# Altium PCB UZ_A_Template.PcbDoc
Units mm, origin at the board's own origin, x right, y up, seen from the top; angles counter-clockwise.
Board outline 156 x 100 mm, 4 copper layers (Top Layer, GND, VCC, Bottom Layer), stack 0.778 mm thick; 49 components, 68 nets, 188 pads, 0 vias.
Unrouted connection lines stored in the file: 110.
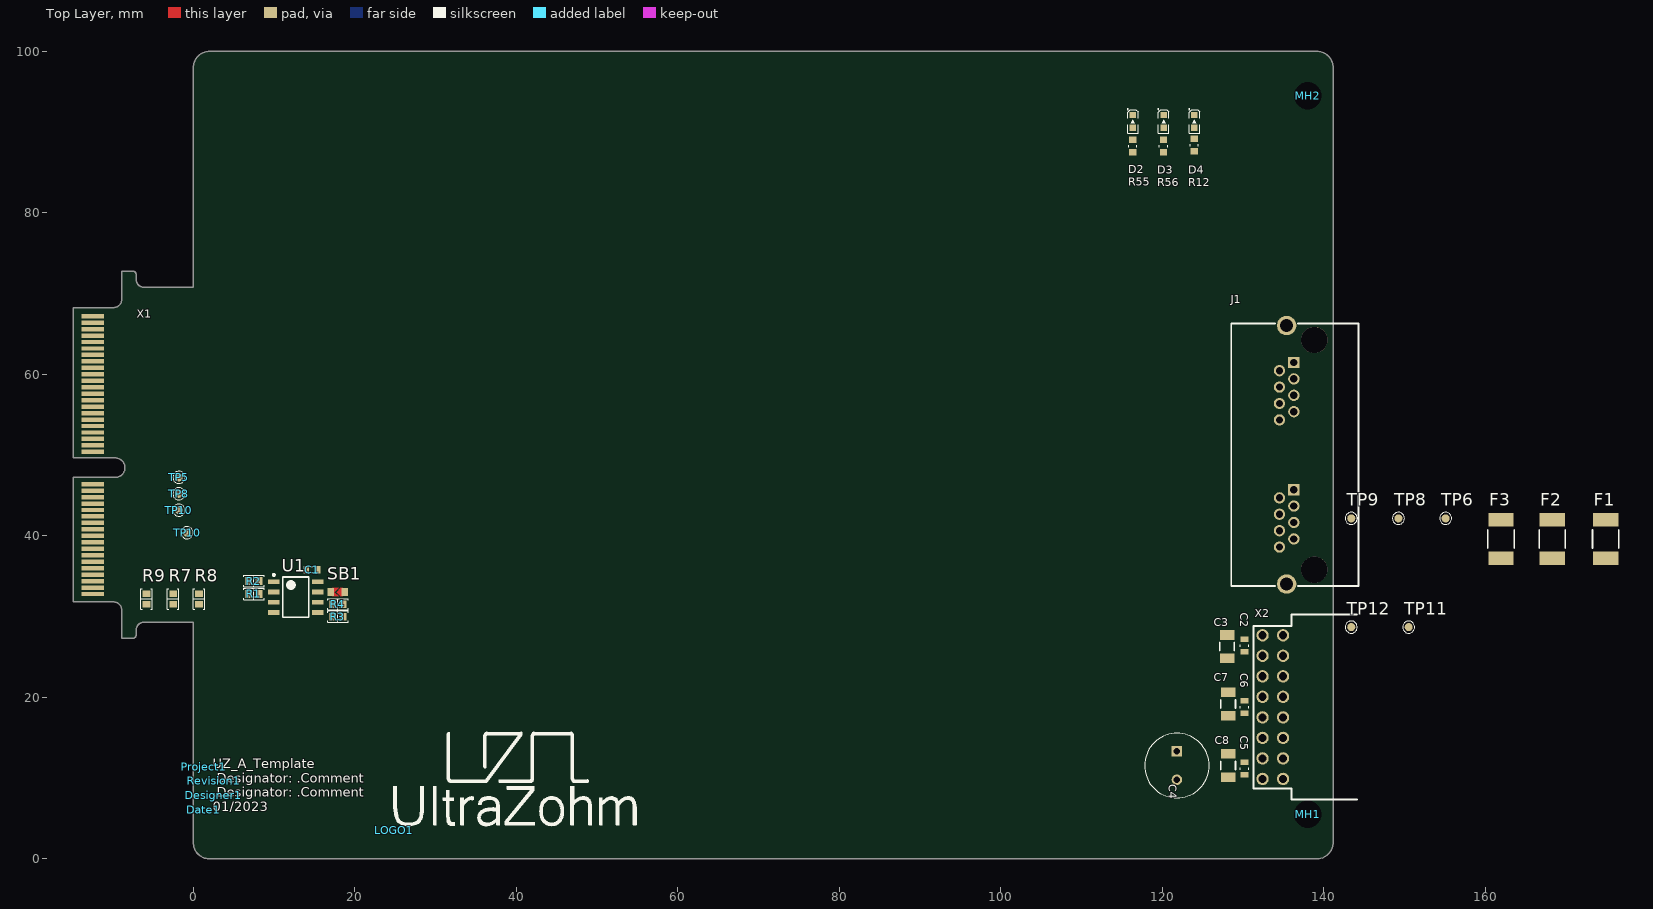
[diagram p0: Top Layer view]
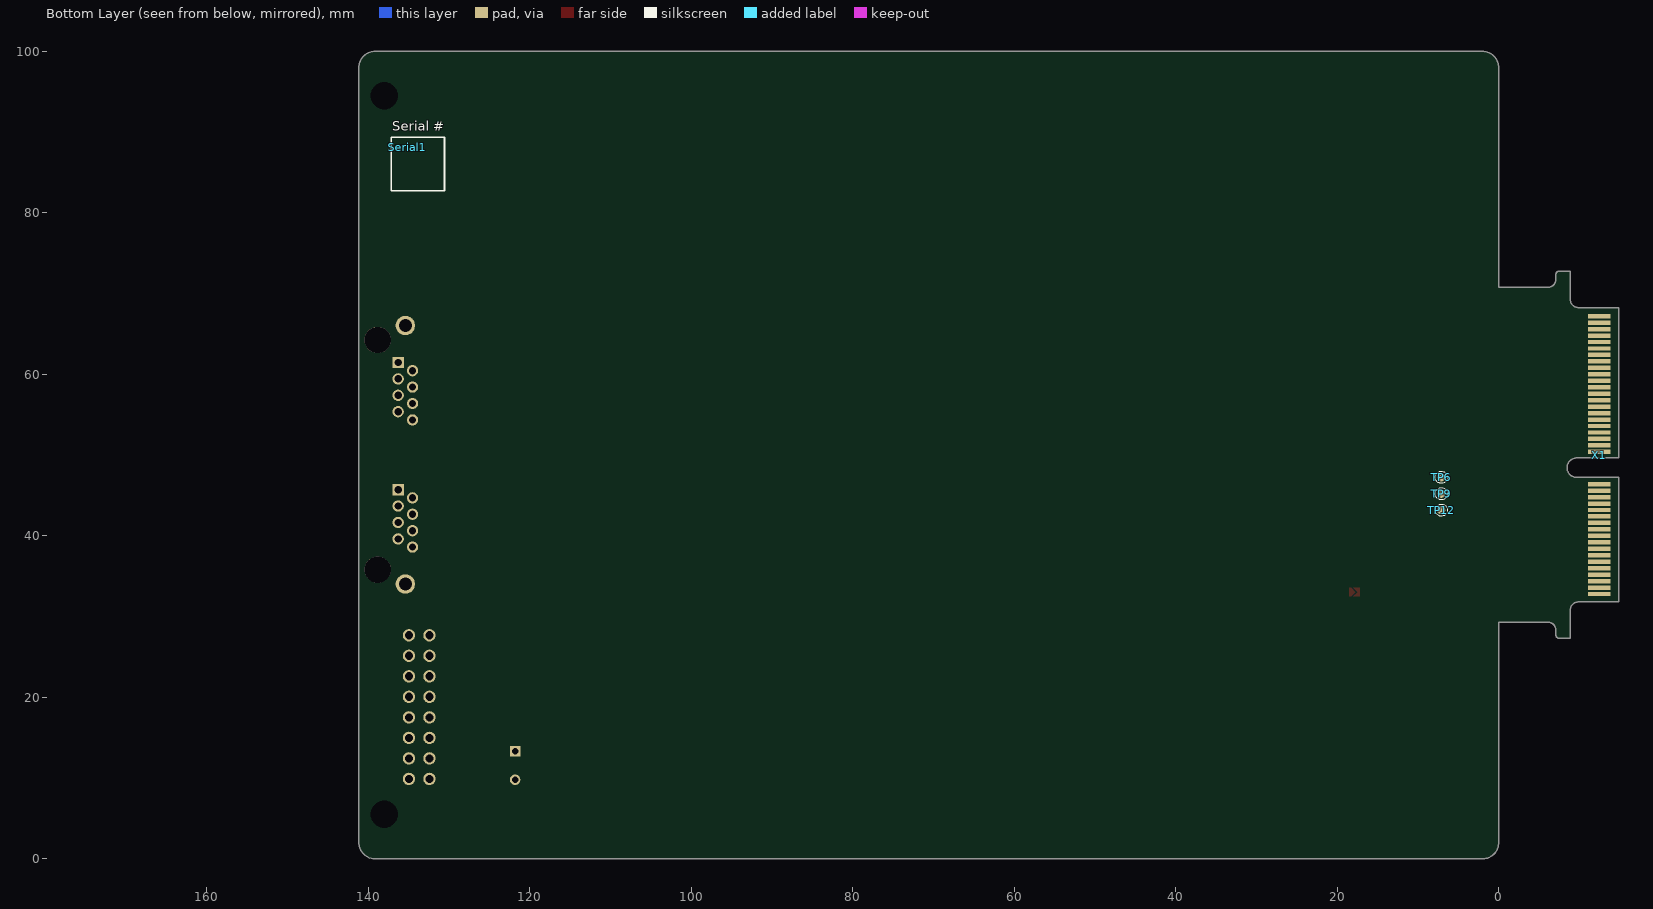
[diagram p1: Bottom Layer view, seen from below]

## Layer stack, top to bottom
Top Solder: solder mask 0.0102, Solder Resist, Dk 3.5
Top Layer: signal copper 0.0356
Dielectric 1: core 0.254, FR-4, Dk 4.2
GND: signal copper 0.036
Dielectric 3: prepreg 0.127, Dk 4.2
VCC: signal copper 0.036
Dielectric 2: core 0.254, Dk 4.2
Bottom Layer: signal copper 0.0356
Bottom Solder: solder mask 0.0102, Solder Resist, Dk 3.5

## Board outline
-14.859,31.821 -9.859,31.821 cw(c-9.859,30.821) -8.859,30.821 -8.859,27.321 -7.479,27.321 ccw(c-7.479,27.721) -7.079,27.721 -7.079,28.321 cw(c-6.079,28.321) -6.079,29.321 0,29.321 0,2.007 ccw(c2.032,2.032) 2.057,0 139.1,0 ccw(c139.1,2.04) 141.14,2.04 141.14,97.96 ccw(c139.1,97.96) 139.1,100 2.032,100 ccw(c2.032,97.968) 0,97.968 0,70.771 -6.079,70.771 cw(c-6.079,71.771) -7.079,71.771 -7.079,72.371 ccw(c-7.479,72.371) -7.479,72.771 -8.859,72.771 -8.859,69.271 cw(c-9.859,69.271) -9.859,68.271 -14.859,68.271 -14.859,49.646 -9.659,49.646 cw(c-9.659,48.446) -9.659,47.246 -14.859,47.246

## Design rules (kind name [scope] priority, off if disabled: settings)
BoardOutlineClearance BoardOutlineClearance_TopOverlay [OnLayer('Top Overlay') or OnLayer('Bottom Overlay')] p1: gap=0 ignorepadtopadclearanceinfootprint=FALSE
BoardOutlineClearance [All] p2: gap=0.508 ignorepadtopadclearanceinfootprint=FALSE except(0: Arc-SplitContinuation Track-SplitContinuation SMDPad-SplitContinuation THPad-SplitContinuation Via-SplitContinuation Fill-SplitContinuation Poly-SplitContinuation Region-SplitContinuation Text-OutlineEdge Text-CavityEdge Text-CutoutEdge Text-SplitBarrior Text-SplitContinuation; 0.254: SMDPad-OutlineEdge SMDPad-CavityEdge SMDPad-CutoutEdge SMDPad-SplitBarrior)
Clearance [All] p1: gap=0.09 ignorepadtopadclearanceinfootprint=FALSE except(0: Arc-Text Arc-Hole Track-Text Track-Hole SMDPad-Text SMDPad-Hole THPad-Text THPad-Hole Via-Text Via-Hole Fill-Text Fill-Hole Poly-Text Poly-Hole Region-Text Region-Hole Text-Text Text-Hole; 0.127: Arc-Via Track-Via SMDPad-Via THPad-Via Via-Via; 0.9: Arc-Arc Arc-Track Arc-SMDPad Arc-THPad Track-Track Track-SMDPad Track-THPad SMDPad-SMDPad SMDPad-THPad THPad-THPad)
DiffPairsRouting [All] p1: maxlimit=0.254 minlimit=0.089 mostfreqgap=0.178 toplayer_minwidth=0.089 toplayer_maxwidth=0.381 toplayer_prefwidth=0.254 midlayer1_minwidth=0.089 midlayer1_maxwidth=0.381 midlayer1_prefwidth=0.254 midlayer2_minwidth=0.089 midlayer2_maxwidth=0.381 midlayer2_prefwidth=0.254 bottomlayer_minwidth=0.089 bottomlayer_maxwidth=0.381 bottomlayer_prefwidth=0.254 maxuncoupledlength=12.7
HoleSize [All] p1: absolutevalues=TRUE maxlimit=6.3 minlimit=0.2 maxpercent=80.000 minpercent=20.000
MatchedLengths [All] p1: tolerance=0.254 checknetsindiffpair=TRUE checkdiffpairvsdiffpair=FALSE checkxsignals=FALSE checkothers=FALSE
MinimumSolderMaskSliver [All] p1: minsoldermaskwidth=0.089
PlaneConnect [All] p1: pad.planeconnectstyle=Relief pad.reliefexpansion=0.508 pad.reliefentries=4 pad.reliefconductorwidth=0.254 pad.reliefairgap=0.254 via.planeconnectstyle=Direct via.reliefexpansion=0.508 via.reliefentries=4 via.reliefconductorwidth=0.254 via.reliefairgap=0.254
PolygonConnect PolygonConnect_GND [InNet('GND')] p1: thpad.connectstyle=Relief thpad.reliefconductorwidth=0.254 thpad.reliefentries=4 thpad.polygonreliefangle="90 Angle" thpad.airgapwidth=0.254 smdpad.connectstyle=Relief smdpad.reliefconductorwidth=0.254 smdpad.reliefentries=4 smdpad.polygonreliefangle="90 Angle" smdpad.airgapwidth=0.254 via.connectstyle=Direct via.reliefconductorwidth=0.254 via.reliefentries=4 via.polygonreliefangle="90 Angle" via.airgapwidth=0.254
PolygonConnect [All] p2: connectstyle=Direct reliefconductorwidth=0.254 reliefentries=4 polygonreliefangle="90 Angle" airgapwidth=0.127
RoomDefinition Component_UpperEdgeKeepOut [All] p1: confinementstyle=ConfineOut formatcopy=TRUE lockcomponents=FALSE outline 0,97 142,97 142,100 0,100
RoomDefinition Component_LowerEdgeKeepOut [All] p2: confinementstyle=ConfineOut formatcopy=TRUE lockcomponents=FALSE outline 0,0 142,0 142,3 0,3
RoutingVias [All] p1: holewidth=0.3 width=0.6 viastyle="Through Hole" minholewidth=0.2 minwidth=0.45 maxholewidth=0.8 maxwidth=1.6
SilkToSilkClearance [All] p1: silktosilkclearance=0
SilkToSolderMaskClearance [IsPad] p1: minsilkscreentomaskgap=0 clearancetoexposedcopper=TRUE
SolderMaskExpansion [All] p1: expansion=0.102 istentingtop=FALSE
Width [All] p1: maxlimit=0.762 minlimit=0.089 preferedwidth=0.254
24 further rules are at their usual default settings.

## Classes and differential pairs
component class TopSheet: Date1 Designer1 LOGO1 Project1 ProjectName1 Revision1 Serial1 Serial2
net class AIN_B_P[1..4]: AIN_B_P1 AIN_B_P2 AIN_B_P3 AIN_B_P4
net class AIN_B_N[1..4]: AIN_B_N1 AIN_B_N2 AIN_B_N3 AIN_B_N4
net class AIN_A_P[1..4]: AIN_A_P1 AIN_A_P2 AIN_A_P3 AIN_A_P4
net class AIN_A_N[1..4]: AIN_A_N1 AIN_A_N2 AIN_A_N3 AIN_A_N4
component class U_CarrierConnector: C1 F1 F2 F3 R1 R2 R3 R4 R7 R8 R9 SB1 TP5 TP6 TP8 TP9 TP10 TP11 TP12 U1 X1
component class U_AnalogConnector: C2 C3 C4 C5 C6 C7 C8 D2 D3 D4 J1 MH1 MH2 R12 R55 R56 X2

## Components (designator, comment, footprint, x,y, rotation, side; value= is the part's Value field where it differs from the comment)
C1 "100 nF" C_0603 14.7,35.8 r180 top
C2 "100nF" CAPC1608X07N 130.175,26.416 r90 top
C3 "10µF" C_1206 128.016,26.289 r270 top
C4 "220 uF" WCAP-ATG5_8X11.5X3.5 121.793,11.557 r90 top
C5 "100nF" CAPC1608X07N 130.175,11.176 r90 top
C6 "100nF" CAPC1608X07N 130.175,18.796 r90 top
C7 "10µF" C_1206 128.143,19.177 r270 top
C8 "10µF" C_1206 128.143,11.557 r270 top
D2 "150060BS75000" WL-SMCW_0603 116.332,91.313 r270 top (schematic designator D1)
D3 "150060GS75000" WL-SMCW_0603 120.142,91.313 r270 top (schematic designator D2)
D4 "150060RS75000" WL-SMCW_0603 123.952,91.313 r270 top (schematic designator D3)
Date1 "01/2023" COMMENT 1.27,6.096 r0 top
Designer1 "A. Musterfrau" Designator:comment 2.54,7.874 r0 top
F1 "Littelfuse_PTC_1812" 1812_PTC_Polyfuse_Littelfuse 174.879,39.624 r90 top value="PTC, 1.1 A, 24V"
F2 "Littelfuse_PTC_1812" 1812_PTC_Polyfuse_Littelfuse 168.275,39.624 r90 top value="PTC, 1.1 A, 24V"
F3 "Littelfuse_PTC_1812" 1812_PTC_Polyfuse_Littelfuse 161.925,39.624 r90 top value="PTC, 1.1 A, 24V"
J1 "RJHSE-5380-02" RJHSE-5380-02 138.811,35.814 r90 top locked
LOGO1 "UZ Logo" UZ_Logo_small 24.892,3.556 r0 top
MH1 "mounting hole 3,4mm" MH_3.4#1 137.16,3.988 r0 top
MH2 "mounting hole 3,4mm" MH_3.4#2 137.16,94.437 r0 top
Project1 "UZ_A_Template" COMMENT 1.27,11.43 r0 top
R1 "4k7" "RES 0603_1608" 7.5,32.8 r180 top
R2 "4k7" "RES 0603_1608" 7.5,34.4 r180 top
R3 "100k" "RES 0603_1608" 17.893,30 r0 top
R4 "100k" "RES 0603_1608" 17.893,31.539 r0 top
R7 "0R" "RES 0603_1608" -2.5,32.189 r90 top
R8 "0R" "RES 0603_1608" 0.7,32.189 r90 top
R9 "0R" "RES 0603_1608" -5.8,32.189 r90 top
R12 "1k" RESC1608X06N 123.952,88.392 r270 top
R55 "20k" RESC1608X06N 116.332,88.265 r270 top (schematic designator R10)
R56 "4.7k" RESC1608X06N 120.142,88.265 r270 top (schematic designator R11)
Revision1 "Rev01" Designator:comment 2.54,9.652 r0 top
SB1 "Solder Bump 0603" SB_0603 17.893,33.047 r0 top
Serial1 "Serial #" SERIAL 135.128,88.138 r180 bottom
TP5 "PIN47" TP_1MM -1.778,47.244 r0 top value="Testpoint 1mm" (schematic designator TP1)
TP6 "PIN53" TP_1mm 155.067,42.164 r90 top value="Testpoint 1mm"
TP6 "PIN48" TP_1MM 7.112,47.244 r180 bottom value="Testpoint 1mm" (schematic designator TP2)
TP8 "PIN53" TP_1mm 149.225,42.164 r90 top value="Testpoint 1mm"
TP8 "PIN49" TP_1MM -1.778,45.212 r0 top value="Testpoint 1mm" (schematic designator TP3)
TP9 "PIN53" TP_1mm 143.383,42.164 r90 top value="Testpoint 1mm"
TP9 "PIN50" TP_1MM 7.112,45.212 r180 bottom value="Testpoint 1mm" (schematic designator TP4)
TP10 "PIN53" TP_1MM -0.762,40.386 r0 top value="Testpoint 1mm"
TP10 "PIN53" TP_1MM -1.778,43.18 r0 top value="Testpoint 1mm" (schematic designator TP5)
TP11 "PIN53" TP_1mm 150.495,28.702 r90 top value="Testpoint 1mm"
TP12 "PIN53" TP_1mm 143.383,28.702 r90 top value="Testpoint 1mm"
TP12 "PIN56" TP_1MM 7.112,43.18 r180 bottom value="Testpoint 1mm" (schematic designator TP7)
U1 "M24C02-WMN6TP" D0008A_N 12.691,32.412 r0 top
X1 "HSEC8-140-01-XX-DV-A-BL-CARD" HSEC8-140-01-XX-DV-A-BL-CARD -14.846,50 r270 bottom
X2 "IPL1-108-01-L-D-RA-K" IPL1-108-01-L-D-RA-K 133.669,18.796 r270 top

## Footprints (in the part's own frame and the unit in brackets; to place one, negate y for a bottom-side part, rotate by r counter-clockwise, add the part's x,y. Pads: shape width x height; smd on the part's side, far side on the other; paste and mask are expansions set on the pad)
1812_PTC_Polyfuse_Littelfuse [mm] "Chip Fuse, 2-Leads, Body 4.6x3.24mm"
  rect 1.68x3.14 smd: 1(-2.39,0) 2(2.39,0)
  silkscreen extent -1.15,-1.62 1.15,1.62, body extent -2.3,-1.62 2.3,1.62, height 1.15
C_0603 [mm] "Chip Capacitor, Body 1.6x0.8mm, Height 1.0mm, IPC High Density"
  rect 0.7x0.9 smd: 1(-0.7,0) 2(0.7,0)
  silkscreen extent -0.05,-0.35 0.05,0.35, body extent -0.87,-0.47 0.88,0.48, height 1
C_1206 [mm]
  rect 1.21x1.82 smd: 1(1.45,0) 2(-1.45,0)
  silkscreen extent -0.5,-0.9 0.5,0.9, body extent -1.6,-0.81 1.6,0.81, height 1.82
CAPC1608X07N [mm] "Chip Capacitor, 2-Leads, Body 1,60x0,80mm, IPC Medium Density"
  rect 0.7x1 smd: 1(-0.775,0) 2(0.775,0)
  silkscreen extent -0.13,-0.51 0.13,0.51, body extent -0.88,-0.48 0.88,0.47, height 0.7
COMMENT [mm] "prints out the comment of a component"
D0008A_N [mm] "SOIC, 8-Leads, Body 5x4mm, Pitch 1.27mm, IPC Medium Density"
  rrect17% 1.45x0.6 smd: 1(-2.725,1.905) 2(-2.725,0.635) 3(-2.725,-0.635) 4(-2.725,-1.905) 5(2.725,-1.905) 6(2.725,-0.635) 7(2.725,0.635) 8(2.725,1.905)
  silkscreen extent -2.85,-2.5 1.6,2.88, body extent -3,-2.45 3,2.45, height 1.63
Designator:comment [mm] "prints out designator and comment of a component"
HSEC8-140-01-XX-DV-A-BL-CARD [mm]
  rect 0.55x2.8 smd far side mask+0.05: 1(-17.2,-2.4) 3(-16.4,-2.4) 5(-15.6,-2.4) 7(-14.8,-2.4) 9(-14,-2.4) 11(-13.2,-2.4) 13(-12.4,-2.4) 15(-11.6,-2.4) 17(-10.8,-2.4) 19(-10,-2.4) 21(-9.2,-2.4) 23(-8.4,-2.4) 25(-7.6,-2.4) 27(-6.8,-2.4) 29(-6,-2.4) 31(-5.2,-2.4) 33(-4.4,-2.4) 35(-3.6,-2.4) 37(-2.8,-2.4) 39(-2,-2.4) 41(-1.2,-2.4) 43(-0.4,-2.4) 45(3.6,-2.4) 47(4.4,-2.4) 49(5.2,-2.4) 51(6,-2.4) 53(6.8,-2.4) 55(7.6,-2.4) 57(8.4,-2.4) 59(9.2,-2.4) 61(10,-2.4) 63(10.8,-2.4) 65(11.6,-2.4) 67(12.4,-2.4) 69(13.2,-2.4) 71(14,-2.4) 73(14.8,-2.4) 75(15.6,-2.4) 77(16.4,-2.4) 79(17.2,-2.4)
  rect 0.55x2.8 smd mask+0.05: 2(-17.2,-2.4) 4(-16.4,-2.4) 6(-15.6,-2.4) 8(-14.8,-2.4) 10(-14,-2.4) 12(-13.2,-2.4) 14(-12.4,-2.4) 16(-11.6,-2.4) 18(-10.8,-2.4) 20(-10,-2.4) 22(-9.2,-2.4) 24(-8.4,-2.4) 26(-7.6,-2.4) 28(-6.8,-2.4) 30(-6,-2.4) 32(-5.2,-2.4) 34(-4.4,-2.4) 36(-3.6,-2.4) 38(-2.8,-2.4) 40(-2,-2.4) 42(-1.2,-2.4) 44(-0.4,-2.4) 46(3.6,-2.4) 48(4.4,-2.4) 50(5.2,-2.4) 52(6,-2.4) 54(6.8,-2.4) 56(7.6,-2.4) 58(8.4,-2.4) 60(9.2,-2.4) 62(10,-2.4) 64(10.8,-2.4) 66(11.6,-2.4) 68(12.4,-2.4) 70(13.2,-2.4) 72(14,-2.4) 74(14.8,-2.4) 76(15.6,-2.4) 78(16.4,-2.4) 80(17.2,-2.4)
IPL1-108-01-L-D-RA-K [mil]
  round 60 hole 40 mask+3: 1(-350,50) 2(-250,50) 3(-150,50) 4(-50,50) 5(50,50) 6(150,50) 7(250,50) 8(350,50) 9(-350,-50) 10(-250,-50) 11(-150,-50) 12(-50,-50) 13(50,-50) 14(150,-50) 15(250,-50) 16(350,-50)
  silkscreen extent -451,-94 451,410, body extent -430,-58 430,434, height 310
MH_3.4#1 [mm]
  round 3.1 hole 3.4 unplated: 1(0.84,1.512)
MH_3.4#2 [mm]
  round 3.1 hole 3.4 unplated: 1(0.84,0.063)
"RES 0603_1608" [mm] "Chip Resistor, 2-Leads, Body 1.60x0.80mm, IPC Medium Density"
  rect 0.85x0.95 smd: 1(-0.65,0) 2(0.65,0)
  silkscreen extent -1.27,-0.7 1.27,0.7, body extent -0.8,-0.4 0.8,0.4, height 0.45
RESC1608X06N [mm] "Chip Resistor, 2-Leads, Body 1,60x0,80mm, IPC Medium Density"
  rect 0.85x0.9 smd: 1(-0.775,0) 2(0.775,0)
  silkscreen extent -0.13,-0.51 0.13,0.51, body extent -0.8,-0.4 0.8,0.4, height 0.44
RJHSE-5380-02 [mm] "Modular Jack Horizontal Shielded Dual Port 8P8C Tab Up"
  rect 1.4x1.4 hole 0.9: A1(9.906,2.54) B1(25.654,2.54)
  round 1.4 hole 0.9: A2(8.89,4.318) A3(7.874,2.54) A4(6.858,4.318) A5(5.842,2.54) A6(4.826,4.318) A7(3.81,2.54) A8(2.794,4.318) B2(24.638,4.318) B3(23.622,2.54) B4(22.606,4.318) B5(21.59,2.54) B6(20.574,4.318) B7(19.558,2.54) B8(18.542,4.318)
  round 3.25 hole 3.25 unplated: MH1(0,0) MH2(28.448,0)
  round 2.4 hole 1.6: S1(-1.778,3.429) S2(30.226,3.429)
  silkscreen extent -2.03,-5.46 30.48,10.29, body extent -3.5,-5.41 31.95,10.29, height 15.06
SB_0603 [mil] "Solder Bump"
  rect 32x40 smd: 1(33.75,0) 2(-33.75,0)
  Top Layer region: 23.75,20 13.75,20 -6.25,0 13.75,-20 23.75,-20
  Top Layer region: -26.25,0 -16.25,0 3.75,20 -26.25,20
  Top Layer region: -26.25,0 -16.25,0 3.75,-20 -26.25,-20
SERIAL [mm]
  silkscreen extent -2,-5.4 4.6,1.2
TP_1MM [mm]
  round 1 smd paste-1: 1(0,0)
  silkscreen extent -0.75,-0.75 0.75,0.75
TP_1mm [mm]
  round 1 smd paste-1: 1(0,0)
  silkscreen extent -0.75,-0.75 0.75,0.75
UZ_Logo_small [mm] "logo width 3cm"
  silkscreen extent -0.05,0.57 29.94,12.12
WCAP-ATG5_8X11.5X3.5 [mm] "Aluminum Electrolytic Capacitors, 8x11.5mm"
  rect 1.3x1.3 hole 0.8: 1(1.75,0)
  round 1.3 hole 0.8: 2(-1.75,0)
  silkscreen extent -4,-4 4,4, body extent -3.99,-4 4,4, height 11.81
WL-SMCW_0603 [mm] "SMD Mono-color Chip LED, body 1.6x0.8mm"
  rect 0.8x0.8 smd: 1(-0.8,0) 2(0.8,0)
  silkscreen extent -1.59,-0.7 1.45,0.65, body extent -0.8,-0.4 0.8,0.4, height 0.7

## Part data
C1: library part C0603C104K9PACTU, "Capacitor 0603, 6.3 VDC, 100 nF, X5R", Device Package=0603, Manufacturer=KEMET, Operating Temperature="-55 - 85°C", Supplier Part Number 1=80-C0603C104K9P, Tolerance="10 %", Voltage Rating="6.3 VDC", Component Type="Capacitor 0603", ComponentLink1Description=Datasheet, ComponentLink1URL=https://www.mouser.de/datasheet/2/212/KEM_C1006_X5R_SMD-1103249.pdf, Created from=MGremer, Created On="20.12.2020 13:54:13", Last Updated="20.01.2021 13:57:36", Live Cycle Status=1, Manufacturer Part Number=C0603C104K9PACTU, Mounting Type=SMD, PartID=70, Series="SMD Comm X5R", Stock number="not stored", Supplier 1=Mouser, Type=Capacitor
C2 C5 C6: library part Cap_0603, Dielectric=X7R, MPN=885012206071, Package=0603, Supplier Part Number 1=710-885012206071, Voltage=25V, MF=Würth, Supplier 1=Mouser
C3 C7 C8: library part C_1206, "Capacitor 1206", Dielectric=X5R, MPN=GRM319R6YA106KA12D, Package=1206, Supplier Part Number 1=81-GRM319R6YA106KA2D, Tolerance=10%, Voltage=35V, Created=2018_06_25_AGeiger, MF="Murata Electronics", Supplier 1=Mouser
C4: library part 860020574012, "WCAP-ATG5 Aluminum Electrolytic Capacitors, 8x11.5mm, 35 Vdc, 220 uF", Operating Temperature="-40 °C up to +105 °C", Supplier Part Number 1=710-860020574012, Voltage=35V, ComponentLink1Description=Manufacturer, ComponentLink1URL=http://www.we-online.de, ComponentLink2Description=Datasheet, ComponentLink2URL=http://katalog.we-online.com/pbs/datasheet/860020574012.pdf, Life Cycle=2000h, MF="Wurth Elektronik", MPN=860020574012, Part Number=860020574012, Published Date="Sep. 2017", Size=8x11.5mm, Supplier 1=Mouser
D2: library part LED_Blue_0603, "WL-SMCW SMD Mono-color Chip LED Waterclear, size 0603, Blue, 3.2 V, 140°", Emitting Color=Blue, Forward Voltage="3.2 V", Package=0603, Supplier Part Number 1=2322069, ComponentLink1Description=Manufacturer, ComponentLink1URL=http://www.we-online.de, ComponentLink2Description=Datasheet, ComponentLink2URL=http://katalog.we-online.com/led/datasheet/150060BS75000.pdf, Created=2018_09_06_AGeiger, Dominant Wavelength="470 nm", Luminous Intensity="145 mcd", MF="Wuerth Elektronik", MPN=150060BS75000, Peak Wavelength="465 nm", Published Date="Sep. 2017", Size=0603, Supplier 1=Farnell, Supplier 2=Mouser, Supplier 3=Digi-Key, Supplier Part Number 2=710-150060BS75000, Supplier Part Number 3=732-4966-1-ND, Viewing Angle=140°
D3: library part LED_Green_0603, "WL-SMCW SMD Mono-color Chip LED Waterclear, size 0603, Green, 3.2 V, 140°", Emitting Color=Green, Forward Voltage="3.2 V", Package=0603, Supplier Part Number 1=2322070, ComponentLink1Description=Manufacturer, ComponentLink1URL=http://www.we-online.de, ComponentLink2Description=Datasheet, ComponentLink2URL=http://katalog.we-online.com/led/datasheet/150060GS75000.pdf, Created=2018_09_06_AGeiger, Dominant Wavelength="520 nm", Luminous Intensity="430 mcd", MF="Wuerth Elektronik", MPN=150060GS75000, Peak Wavelength="515 nm", Published Date="Sep. 2017", Size=0603, Supplier 1=Farnell, Supplier 2=Mouser, Supplier 3=Digi-Key, Supplier Part Number 2=710-150060GS75000, Supplier Part Number 3=732-4971-1-ND, Viewing Angle=140°
D4: library part LED_Red_0603, "WL-SMCW SMD Mono-color Chip LED Waterclear, size 0603, Red, 2 V, 140°", Emitting Color=Red, Forward Voltage="2 V", Package=0603, Supplier Part Number 1=2322071, ComponentLink1Description=Manufacturer, ComponentLink1URL=http://www.we-online.de, ComponentLink2Description=Datasheet, ComponentLink2URL=http://katalog.we-online.com/led/datasheet/150060RS75000.pdf, Created=2018_09_06_AGeiger, Dominant Wavelength="625 nm", Luminous Intensity="250 mcd", MF="Wuerth Elektronik", MPN=150060RS75000, Peak Wavelength="630 nm", Published Date="Sep. 2017", Size=0603, Supplier 1=Farnell, Supplier 2=Mouser, Supplier 3=Digi-Key, Supplier Part Number 2=710-150060RS75000, Supplier Part Number 3=732-4978-1-ND, Viewing Angle=140°
Date1: library part 5, "Create a project parameter named \"FinDate\" this is the value of this component. It is printed on the PCB. Once the parameter is updated (e.g. new revision) it gets updated on the PCB as well", Manufacturer="PCB Manufacturer", Manufacturer Part Number="Project End Date", Component Type="Date of Project Finalization", Created from="T. Wendt", Created On="01.03.2021 09:01:41", Last Updated="01.03.2021 09:01:41", Live Cycle Status=1, PartID=5, Type="Standard (No BOM)"
Designer1: library part 4, "Create a project parameter named \"Author\" this is the value of this component. It is printed on the PCB. Once the parameter is updated (e.g. new revision) it gets updated on the PCB as well", Manufacturer="PCB Manufacturer", Manufacturer Part Number="Project Author", Component Type="Project Author", Created from="T. Wendt", Created On="01.03.2021 08:53:41", Last Updated="01.03.2021 09:20:27", Live Cycle Status=1, PartID=4, Type="Standard (No BOM)"
F1 F2 F3: "POLYSWITCH RESETTABLE DEVICES", Hold Current=1.1A, LCSC Part Number=C70119, Manufacturer=Littelfuse, MPN=miniASMDC110F/24, Nominal current="1 A", Operating Temperature="-40 - 85 °C", Package=1812, Resistance="0.18 Ohm", Supplier Part Number 1=530-0ZCG0150BF2C, Trip Current=2.2A, Voltage=24V, Component Type=Littelfuse_PTC_1812, ComponentLink1Description=Datasheet, ComponentLink1URL=https://www.littelfuse.com/~/media/electronics/datasheets/resettable_ptcs/littelfuse_ptc_surface_mount_catalog_datasheet.pdf.pdf, Created=2019_02_10_AGeiger, Created from=MHlatky, Created On="07.05.2021 06:50:33", Last Updated="27.05.2022 15:06:17", Live Cycle Status=1, Manufacturer Part Number=Littelfuse_PTC_1812, MF=Littelfuse, Mounting Type=SMD, PartID=5, Supplier 1=Mouser, Type=Fuse
J1: "Modular Jack WR-MJ, Tab Up, Shielded, Dual Port, Righ Angle, THT, 8P8C", Contact Resistance="20 mOhm", Operating Temperature="-40 to 85 degC", Rated Current="1.5 A", Supplier Part Number 1=523-RJHSE-5380-02, Withstanding Voltage="1000 VAC", Working Voltage="120 VAC", Compliance="Lead free / RoHS", ComponentLink1Description=Manufacturer, ComponentLink1URL=http://www.we-online.de, ComponentLink2Description=Datasheet, ComponentLink2URL=https://katalog.we-online.de/em/datasheet/615016137621.pdf, Entrance="Right Angle", MF=Amphenol, Mounting Technology=THT, MPN=RJHSE-5380-02, Packaging=Tray, Pin Number=8P8C, Port=1x2, Published Date="July 2018", Supplier 1=Mouser
LOGO1: library part 1, "Official Project Logo of the UltraZohm", Manufacturer="PCB Manufacturer", Manufacturer Part Number="UltraZohm Logo", Component Type=Logo, ComponentLink1Description=Homepage, ComponentLink1URL=https://ultrazohm.com, Created from="T. Wendt", Created On="19.02.2021 16:55:56", Last Updated="02.03.2021 14:31:24", Live Cycle Status=1, PartID=1, Type="Standard (No BOM)"
MH1 MH2: library part "Mounting Hole", "Non plated through hole, 3.4mm"
Project1: library part 2, "Create a project parameter named \"ProjectNameCustom\" this is the value of this component and it is printed on the PCB.", Manufacturer="PCB Manufacturer", Manufacturer Part Number="Project Name", Component Type="Project Name", Created from="T. Wendt", Created On="01.03.2021 08:43:57", Last Updated="01.03.2021 09:07:27", Live Cycle Status=1, PartID=2, Type="Standard (No BOM)"
R1 R2: library part 0603WAF4701T5E, "SMD resistor E24 series", Device Package=0603, LCSC Part Number=C23162, Manufacturer=UNI-ROYAL, Tolerance=1%, Component Type="SMD resistor", ComponentLink1Description=Datasheet, ComponentLink1URL=https://datasheet.lcsc.com/lcsc/2206010116_UNI-ROYAL-Uniroyal-Elec-0603WAF4701T5E_C23162.pdf, Created from=AGeiger, Created On="14.12.2020 16:17:14", Last Updated="25.08.2022 20:03:04", Live Cycle Status=1, Manufacturer Part Number=0603WAF4701T5E, Mounting Type=SMD, PartID=90, Stock number="Labor SMD Container", Supplier 1=LCSC, Supplier Part Number 1=C23162, Type=Resistor
R3 R4: library part RK73B1JTTD104J, "SMD resistor E24 series", Device Package=0603, LCSC Part Number=C25803, Manufacturer="KOA Speer", Supplier Part Number 1=660-RK73B1JTTD104J, Tolerance=5%, Component Type="SMD resistor", ComponentLink1Description=Datasheet, ComponentLink1URL=https://www.mouser.de/datasheet/2/219/RK73B-1825463.pdf, Created from=MGremer, Created On="14.12.2020 16:17:14", Last Updated="27.05.2022 14:04:10", Live Cycle Status=1, Manufacturer Part Number=RK73B1JTTD104J, Mounting Type=SMD, PartID=122, Stock number="Labor SMD Container", Supplier 1=Mouser, Type=Resistor
R7 R8 R9: library part RC0603JR-070RL, "SMD resistor E24 series", Device Package=0603, LCSC Part Number=C21189, Manufacturer=YAGEO, Supplier Part Number 1=603-RC0603JR-070RL, Tolerance=5%, Component Type="SMD resistor", ComponentLink1Description=Datasheet, ComponentLink1URL=https://www.mouser.de/datasheet/2/447/PYu-RC_Group_51_RoHS_L_10-1664068.pdf, Created from=MGremer, Created On="14.12.2020 16:17:14", Last Updated="04.03.2021 09:09:42", Live Cycle Status=1, Manufacturer Part Number=RC0603JR-070RL, Mounting Type=SMD, PartID=1, Stock number="Labor SMD Container", Supplier 1=Mouser, Supplier 2=LCSC, Supplier Part Number 2=C21189, Type=Resistor
R12: library part R_0603, MPN=CRCW06031K00JNEAC, Package=0603, Supplier Part Number 1=71-CRCW06031K00JNEAC, MF="Vishay / Dale", Supplier 1=Mouser
R55: library part R_0603, MPN=CRCW060320K0JNEAC, Package=0603, Supplier Part Number 1=71-CRCW060320K0JNEAC, MF="Vishay / Dale", Supplier 1=Mouser
R56: library part R_0603, MPN=CRCW06034K70JNEAC, Package=0603, Supplier Part Number 1=71-CRCW06034K70JNEAC, MF="Vishay / Dale", Supplier 1=Mouser
Revision1: library part 3, "Create a project parameter named \"ProjectRevision\" this is the value of this component. It is printed on the PCB. Once the parameter is updated (e.g. new revision) it gets updated on the PCB as well", Manufacturer="PCB Manufacturer", Manufacturer Part Number="Project Revision", Component Type="Project Revision", Created from="T. Wendt", Created On="01.03.2021 08:50:34", Last Updated="01.03.2021 09:28:36", Live Cycle Status=1, PartID=3, Type="Standard (No BOM)"
SB1: library part =Value, Device Package=0603, Component Type="Solder Bump", Created from=AGeiger, Created On="09.01.2024 17:13:56", Last Updated="09.01.2024 17:13:56", Manufacturer Part Number="Solder Bump 0603", Mounting Type=SMD, PartID=1, Revision="July-2002: Re-released for DXP Platform."
Serial1: library part 6, "Field to put in a serial number", Manufacturer="PCB Manufacturer", Manufacturer Part Number="Serial Number", Component Type="Serial Number", Created from="T. Wendt", Created On="02.03.2021 14:31:24", Last Updated="02.03.2021 14:31:24", Live Cycle Status=1, PartID=6, Type="Standard (No BOM)"
TP5 TP6 TP6 TP8 TP8 TP9 TP9 TP10 TP10 TP11 TP12 TP12: library part TP_1mm, "Testpoint 1mm", Created=2018_06_25_AGeiger
U1: "2Kbit I2C SOP-8 EEPROM ROHS", Device Package=SOIC-8, LCSC Part Number=C7562, Manufacturer=STMicroelectronics, Operating Temperature="-40 to +85 °C", Supplier Part Number 1=511-M24C02-WMN6TP, Component Type=EEPROM, ComponentLink1Description=Datasheet, ComponentLink1URL=https://www.st.com/resource/en/datasheet/m24c01-w.pdf, Created from=AGeiger, Created On="19.11.2023 14:54:27", Last Updated="19.11.2023 21:39:04", Manufacturer Part Number=M24C02-WMN6TP, Mounting Type=SMD, PartID=1, Series=M24xxx, Supplier 1=Mouser, Supplier 2=LCSC, Supplier Part Number 2=C7562, Type=Memory
X1: "Mating Card Layout for HSEC8-140-01-XX-DV-A-BL", Manufacturer=SAMTEC, Created=2018_04_23_AGeiger
X2: library part IPL1-108-XX-X-D-X, "2.54mm Double Row Terminal Assembly", Supplier Part Number 1=200-IPL110801LDRAK, Created=2018_09_17_AGeiger, MF=SAMTEC, MPN=IPL1-108-01-L-D-RA-K, Supplier 1=Mouser

## Nets (pads, with @x,y where several pads share a name; then routed paths per layer and width w, separated by ;. In a path a pad name is that pad's centre, name@x,y a point inside that pad or via, vN(x,y) a via of type N, cw(c..) or ccw(c..) an arc to the next point about the centre after c; other vN are vias at no path point)
3V3: F3.2
3V3_PER: C1.1 F3.1 R1.2 R2.2 R3.2 R4.2 R7.1 SB1.1 U1.8 X1.13 X1.14
5V: F2.2
5V_PER: F2.1 X1.9 X1.10
ADDR_0: R2.1 U1.1 X1.61
ADDR_1: R1.1 U1.2 X1.77
AIN_A_N1: J1.A8
AIN_A_N2: J1.A5
AIN_A_N3: J1.A6
AIN_A_N4: J1.A2
AIN_A_P1: J1.A7
AIN_A_P2: J1.A4
AIN_A_P3: J1.A3
AIN_A_P4: J1.A1
AIN_B_N1: J1.B8
AIN_B_N2: J1.B5
AIN_B_N3: J1.B6
AIN_B_N4: J1.B2
AIN_B_P1: J1.B7
AIN_B_P2: J1.B4
AIN_B_P3: J1.B3
AIN_B_P4: J1.B1
ANL_00_N: X1.19
ANL_00_P: X1.17
ANL_01_N: X1.20
ANL_01_P: X1.18
ANL_02_N: X1.25
ANL_02_P: X1.23
ANL_03_N: X1.26
ANL_03_P: X1.24
ANL_04_N: X1.31
ANL_04_P: X1.29
ANL_05_N: X1.32
ANL_05_P: X1.30
ANL_06_N: X1.37
ANL_06_P: X1.35
ANL_07_N: X1.38
ANL_07_P: X1.36
ANL_08_N: X1.43
ANL_08_P: X1.41
ANL_09_N: X1.44
ANL_09_P: X1.42
ANL_Res_00: TP8.1@149.225,42.164 X1.59
ANL_Res_01: TP9.1@143.383,42.164 X1.60
ANL_Res_03: TP10.1@-0.762,40.386 X1.62
ANL_Res_05: TP11.1 X1.66
ANL_Res_07: TP12.1@143.383,28.702 X1.68
ANL_Res_14: TP6.1@155.067,42.164 X1.55
ANL_SPI_CLK: TP6.1@7.112,47.244 X1.48
ANL_SPI_CS: TP10.1@-1.778,43.18 X1.53 X1.54
ANL_SPI_MOSI: TP5.1 X1.47
GND: C1.2 C2.1 C3.1 C4.2 C5.1 C6.1 C7.1 C8.1 D2.1 D3.1 D4.1 J1.S1 J1.S2 R9.1 U1.3 U1.4 X1.1 X1.2 X1.3 X1.4 X1.7 X1.8 X1.11 X1.12 X1.15 X1.16 X1.21 X1.22 X1.27 X1.28 X1.33 X1.34 X1.39 X1.40 X1.45 X1.46 X1.51 X1.52 X1.57 X1.58 X1.63 X1.64 X1.69 X1.70 X1.75 X1.76 X2.2 X2.5 X2.8 X2.10 X2.13 X2.16
I2C0_SCL: R4.1 U1.6
I2C0_SDA: R3.1 U1.5
NetD2_2: D2.2 R55.1
NetD3_2: D3.2 R56.1
NetD4_2: D4.2 R12.1
NetR7_2: R7.2 R8.1 R9.2 X1.79
NetR8_2: R8.2 X1.80
NetSB1_2: SB1.2 U1.7
NetX1_78: X1.78
OVCC: R12.2
PS_ANL_shared: TP12.1@7.112,43.18 X1.56
PS_I2C0_shared_SCL: TP8.1@-1.778,45.212 X1.49
PS_I2C0_shared_SDA: TP9.1@7.112,45.212 X1.50
VCC: C4.1 C5.2 C6.2 C7.2 C8.2 R56.2 X2.3 X2.4 X2.6 X2.7 X2.11 X2.12 X2.14 X2.15
VIN: C2.2 C3.2 F1.2 R55.2 X2.1 X2.9
VIN_unfused: F1.1 X1.5 X1.6
pads on no net: J1.MH1 J1.MH2 MH1.1 MH2.1 X1.65 X1.67 X1.71 X1.72 X1.73 X1.74

## Silkscreen, mask and mechanical layers (free items; w line width, h text height)
Mechanical 1:
  lines w0.1: -14.859,31.821 -14.08,31.821 -9.859,31.821 cw(c-9.859,30.821) -8.859,30.821 -8.859,27.321 -7.479,27.321 ccw(c-7.479,27.721) -7.079,27.721 -7.079,28.321 cw(c-6.079,28.321) -6.079,29.321 -0.019,29.321 0,29.321 0,2.007 ccw(c2.032,2.032) 2.057,0 139.1,0 ccw(c139.1,2.04) 141.14,2.04 141.14,97.96 ccw(c139.1,97.96) 139.1,100 2.032,100 ccw(c2.032,97.968) 0,97.968 0,70.771 -6.079,70.771 cw(c-6.079,71.771) -7.079,71.771 -7.079,72.371 ccw(c-7.479,72.371) -7.479,72.771 -8.859,72.771 -8.859,69.271 cw(c-9.859,69.271) -9.859,68.271 -14.08,68.271 -14.859,68.271 -14.859,49.646 -14.08,49.646 -9.659,49.646 cw(c-9.659,48.446) -9.659,47.246 -14.08,47.246 -14.859,47.246 -14.859,31.821

## Dimensions
138,5.5 to 138,94.5 on Mechanical 2
141.541,0 to 144.272,66.294 on Mechanical 2
141.541,0 to 144.272,33.782 on Mechanical 2
141.541,0 to 144.591,29.718 on Mechanical 2
141.541,0 to 144.591,7.874 on Mechanical 2